# Altium PCB PCB1.PcbDoc
Units mil, origin at the board's own origin, x right, y up, seen from the top; angles counter-clockwise.
Board outline 6000 x 4000 mil, 2 copper layers (Top Layer, Bottom Layer); 59 components, 21 nets, 89 pads, 0 vias.
Unrouted connection lines stored in the file: 56.
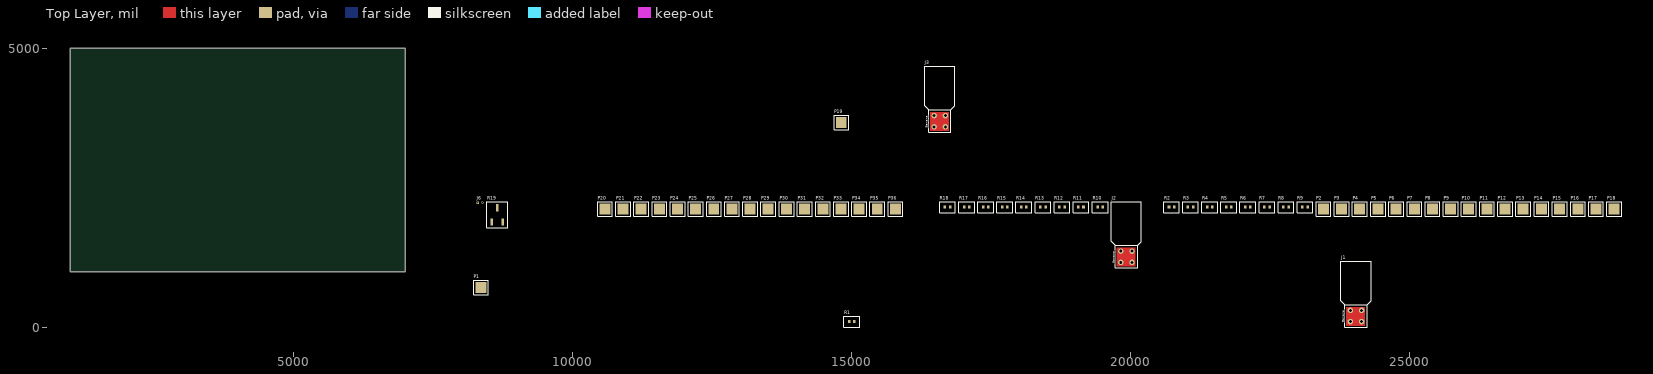
[diagram p0: Top Layer view]
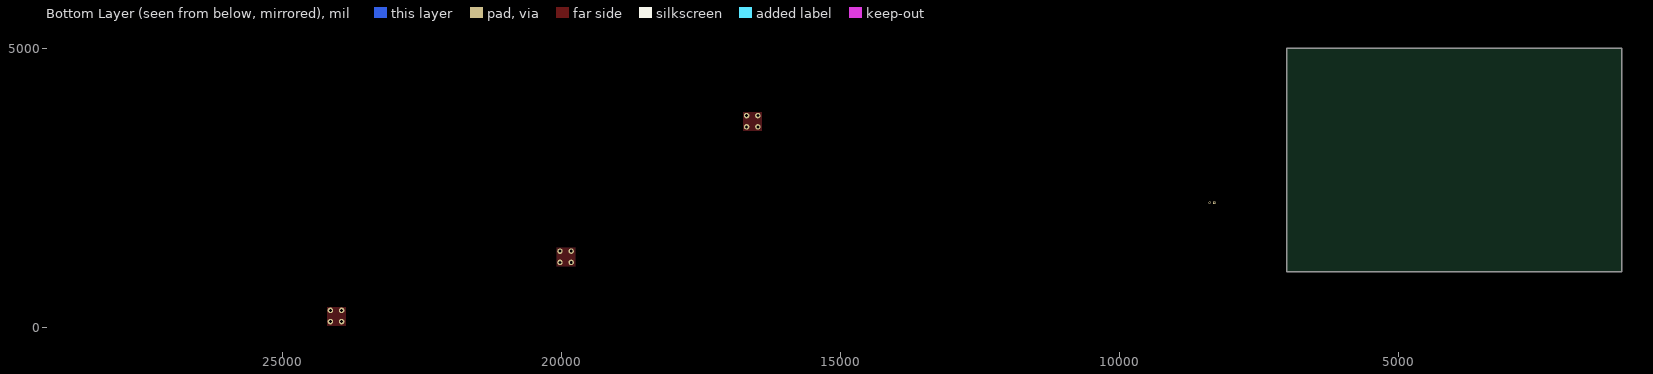
[diagram p1: Bottom Layer view, seen from below]

## Layer stack, top to bottom
Top Solder: solder mask 0.4, Solder Resist, Dk 3.5
Top Layer: signal copper 1.4
Dielectric 1: dielectric 12.6, FR-4, Dk 4.8
Bottom Layer: signal copper 1.4
Bottom Solder: solder mask 0.4, Solder Resist, Dk 3.5

## Board outline
1000,1000 7000,1000 7000,5000 1000,5000

## Design rules (kind name [scope] priority, off if disabled: settings)
Clearance [All] p1: gap=10 ignorepadtopadclearanceinfootprint=FALSE except(0: Arc-Hole Track-Hole SMDPad-Hole THPad-Hole Via-Hole Fill-Hole Poly-Hole Region-Hole Text-Hole)
PolygonConnect [All] p1: connectstyle=Relief reliefconductorwidth=10 reliefentries=4 polygonreliefangle="90 Angle" airgapwidth=10
RoutingVias [All] p1: holewidth=28 width=50 viastyle="Through Hole" minholewidth=28 minwidth=50 maxholewidth=28 maxwidth=50
SolderMaskExpansion [All] p1: expansion=4 istentingtop=FALSE
Width [All] p1: maxlimit=10 minlimit=10 preferedwidth=10
30 further rules are at their usual default settings.

## Components (designator, comment, footprint, x,y, rotation, side; value= is the part's Value field where it differs from the comment)
J1 "CT3151SP-0" CT3151SP-0 23939.21,103.43 r90 top
J2 "CT3151SP-0" CT3151SP-0 19825,1165 r90 top
J3 "CT3151SP-0" CT3151SP-0 16480,3594.21 r90 top
J6 "MOLEX TTL" "MOLEX TTL" 8300,2235 r0 top
P1 "SLAVEBOARD CONTACT" "SLAVEBOARD CONTACT" 8355,715 r0 top
P2 "SLAVEBOARD CONTACT" "SLAVEBOARD CONTACT" 23455,2125 r0 top
P3 "SLAVEBOARD CONTACT" "SLAVEBOARD CONTACT" 23780,2125 r0 top
P4 "SLAVEBOARD CONTACT" "SLAVEBOARD CONTACT" 24105,2125 r0 top
P5 "SLAVEBOARD CONTACT" "SLAVEBOARD CONTACT" 24435,2125 r0 top
P6 "SLAVEBOARD CONTACT" "SLAVEBOARD CONTACT" 24760,2125 r0 top
P7 "SLAVEBOARD CONTACT" "SLAVEBOARD CONTACT" 25085,2125 r0 top
P8 "SLAVEBOARD CONTACT" "SLAVEBOARD CONTACT" 25410,2125 r0 top
P9 "SLAVEBOARD CONTACT" "SLAVEBOARD CONTACT" 25735,2125 r0 top
P10 "SLAVEBOARD CONTACT" "SLAVEBOARD CONTACT" 26060,2125 r0 top
P11 "SLAVEBOARD CONTACT" "SLAVEBOARD CONTACT" 26385,2125 r0 top
P12 "SLAVEBOARD CONTACT" "SLAVEBOARD CONTACT" 26710,2125 r0 top
P13 "SLAVEBOARD CONTACT" "SLAVEBOARD CONTACT" 27035,2125 r0 top
P14 "SLAVEBOARD CONTACT" "SLAVEBOARD CONTACT" 27360,2125 r0 top
P15 "SLAVEBOARD CONTACT" "SLAVEBOARD CONTACT" 27690,2125 r0 top
P16 "SLAVEBOARD CONTACT" "SLAVEBOARD CONTACT" 28015,2125 r0 top
P17 "SLAVEBOARD CONTACT" "SLAVEBOARD CONTACT" 28340,2125 r0 top
P18 "SLAVEBOARD CONTACT" "SLAVEBOARD CONTACT" 28665,2125 r0 top
P19 "SLAVEBOARD CONTACT" "SLAVEBOARD CONTACT" 14815,3670 r0 top
P20 "SLAVEBOARD CONTACT" "SLAVEBOARD CONTACT" 10580,2125 r0 top
P21 "SLAVEBOARD CONTACT" "SLAVEBOARD CONTACT" 10905,2125 r0 top
P22 "SLAVEBOARD CONTACT" "SLAVEBOARD CONTACT" 11230,2125 r0 top
P23 "SLAVEBOARD CONTACT" "SLAVEBOARD CONTACT" 11555,2125 r0 top
P24 "SLAVEBOARD CONTACT" "SLAVEBOARD CONTACT" 11880,2125 r0 top
P25 "SLAVEBOARD CONTACT" "SLAVEBOARD CONTACT" 12205,2125 r0 top
P26 "SLAVEBOARD CONTACT" "SLAVEBOARD CONTACT" 12530,2125 r0 top
P27 "SLAVEBOARD CONTACT" "SLAVEBOARD CONTACT" 12855,2125 r0 top
P28 "SLAVEBOARD CONTACT" "SLAVEBOARD CONTACT" 13180,2125 r0 top
P29 "SLAVEBOARD CONTACT" "SLAVEBOARD CONTACT" 13505,2125 r0 top
P30 "SLAVEBOARD CONTACT" "SLAVEBOARD CONTACT" 13835,2125 r0 top
P31 "SLAVEBOARD CONTACT" "SLAVEBOARD CONTACT" 14160,2125 r0 top
P32 "SLAVEBOARD CONTACT" "SLAVEBOARD CONTACT" 14485,2125 r0 top
P33 "SLAVEBOARD CONTACT" "SLAVEBOARD CONTACT" 14810,2125 r0 top
P34 "SLAVEBOARD CONTACT" "SLAVEBOARD CONTACT" 15135,2125 r0 top
P35 "SLAVEBOARD CONTACT" "SLAVEBOARD CONTACT" 15460,2125 r0 top
P36 "SLAVEBOARD CONTACT" "SLAVEBOARD CONTACT" 15785,2125 r0 top
R1 "1622796-6" "CHP0805-FX-1002ELF - duplicate" 15001.26,102.36 r0 top
R2 "1622796-6" "CHP0805-FX-1002ELF - duplicate" 20735,2155 r0 top
R3 "1622796-6" "CHP0805-FX-1002ELF - duplicate" 21075,2155 r0 top
R4 "1622796-6" "CHP0805-FX-1002ELF - duplicate" 21420,2155 r0 top
R5 "1622796-6" "CHP0805-FX-1002ELF - duplicate" 21760,2155 r0 top
R6 "1622796-6" "CHP0805-FX-1002ELF - duplicate" 22100,2155 r0 top
R7 "1622796-6" "CHP0805-FX-1002ELF - duplicate" 22445,2155 r0 top
R8 "1622796-6" "CHP0805-FX-1002ELF - duplicate" 22785,2155 r0 top
R9 "1622796-6" "CHP0805-FX-1002ELF - duplicate" 23125,2155 r0 top
R10 "1622796-6" "CHP0805-FX-1002ELF - duplicate" 19455,2155 r0 top
R11 "1622796-6" "CHP0805-FX-1002ELF - duplicate" 19110,2155 r0 top
R12 "1622796-6" "CHP0805-FX-1002ELF - duplicate" 18770,2155 r0 top
R13 "1622796-6" "CHP0805-FX-1002ELF - duplicate" 18430,2155 r0 top
R14 "1622796-6" "CHP0805-FX-1002ELF - duplicate" 18085,2155 r0 top
R15 "1622796-6" "CHP0805-FX-1002ELF - duplicate" 17745,2155 r0 top
R16 "1622796-6" "CHP0805-FX-1002ELF - duplicate" 17405,2155 r0 top
R17 "1622796-6" "CHP0805-FX-1002ELF - duplicate" 17065,2155 r0 top
R18 "1622796-6" "CHP0805-FX-1002ELF - duplicate" 16720,2155 r0 top
R19 "potentiometer" 3361P-1-103GLF_SOP3 8545,1995 r0 top

## Footprints (in the part's own frame and the unit in brackets; to place one, negate y for a bottom-side part, rotate by r counter-clockwise, add the part's x,y. Pads: shape width x height; smd on the part's side, far side on the other; paste and mask are expansions set on the pad)
3361P-1-103GLF_SOP3 [mm]
  rect 1.19x3.3 smd: 21(0.127,-2.667) 21(2.667,3.81) 21(5.207,-2.667)
  silkscreen extent -2.03,-5.33 7.37,6.48
"CHP0805-FX-1002ELF - duplicate" [mm]
  rect 1.15x1.3 smd: 1(-1.175,0) 2(1.175,0)
  silkscreen extent -3.6,-2.5 3.6,2.5
CT3151SP-0 [mm]
  round 2.5 hole 1.3: 1(0,0) 1(0,-5.1) 1(5.1,-5.1) 1(5.1,0)
  Top Layer region: -1.905,-6.731 6.731,-6.731 6.731,1.905 -1.905,1.905
  silkscreen extent -2.5,-9.4 27.56,4.32
"MOLEX TTL" [mm]
  rect 1x1 hole 0.643 paste-2539.97: 1(0,0)
  round 1 hole 0.643 paste-2539.97: 2(2.159,0)
"SLAVEBOARD CONTACT" [mm]
  rect 5x5 smd: 1(0,0)
  silkscreen extent -3.3,-3.3 3.43,3.3

## Part data
J1 J2 J3: "Conn 4mm Safety Banana Jack F 1 POS Solder RA Thru-Hole 1 Port Bag", Color=Black, Manufacturer="Cal Test Electronics", Max Operating Temperature=80°C, Min Operating Temperature=-20°C, Supplier Part Number 1=BKCT3151SP-0-ND, Body Material=Nylon,Polyamide, Category=Connectors, ComponentLink1Description=http://www.caltestelectronics.com/images/attachments/P315100rH_drawing.pdf?src-supplier=Digi-Key, ComponentLink1URL=http://www.caltestelectronics.com/images/attachments/P315100rH_drawing.pdf?src-supplier=Digi-Key, Contact Material=Brass, Contact Plating=Nickel, Gender=Female, Insulation="Mating End Insulated", Manufacturer Part Number=CT3151SP-0, Mount="Through Hole,Panel", Packaging=Bulk, Pricing 1="1=2.05000 (USD)", RoHS=Yes, Stock 1=6317, Supplier 1=Digi-Key, Termination=Solder
R1 R2 R3 R4 R5 R6 R7 R8 R9 R10 R11 R12 R13 R14 R15 R16 R17 R18: "Res Thin Film 10K Ohm 0.1% 1/4W 15ppm/C Conformal AXL Thru-Hole Ammo Pack", Case/Package=Conformal, Manufacturer="TE Connectivity", Max Operating Temperature=155°C, Max Power Dissipation=250mW, Min Operating Temperature=-65°C, Package Quantity=1000, Resistance=10kR, Resistor Type="Metal Film,Thin Film", Supplier Part Number 1=A105970CT-ND, Temperature Coefficient=15ppm/°C, Tolerance=0.1%, Category="Through-Hole Resistors", ComponentLink1Description=https://datasheet.ciiva.com/8332/eng-ds-1773265-a-8332394.pdf?src-supplier=Avnet, ComponentLink1URL=https://datasheet.ciiva.com/8332/eng-ds-1773265-a-8332394.pdf?src-supplier=Avnet, ComponentLink2Description=https://datasheet.ciiva.com/6532/eng-ds-1773265-a-6532773.pdf?src-supplier=Digi-Key, ComponentLink2URL=https://datasheet.ciiva.com/6532/eng-ds-1773265-a-6532773.pdf?src-supplier=Digi-Key, ComponentLink3Description=https://datasheet.ciiva.com/48735/eng-ds-1773265-a-48735567.pdf?src-supplier=Onlinecomponents.com, ComponentLink3URL=https://datasheet.ciiva.com/48735/eng-ds-1773265-a-48735567.pdf?src-supplier=Onlinecomponents.com, Construction=Cylindrical, Diameter=2.3mm, Length=6.3mm, Manufacturer Part Number=1622796-6, Military Standard=Not, Mount="Through Hole", Number of Terminations=2, Packaging="Tape and Reel", Pricing 1="1=0.60000, 10=0.50300, 25=0.43120, 50=0.38800, 100=0.33780, 250=0.30184, 500=0.24436 (USD)", RoHS=Yes, RoHS Compliant=Yes, Series="YR, Neohm", Stock 1=35957, Supplier 1=Digi-Key, Termination=Axial

## Nets (pads, with @x,y where several pads share a name; then routed paths per layer and width w, separated by ;. In a path a pad name is that pad's centre, name@x,y a point inside that pad or via, vN(x,y) a via of type N, cw(c..) or ccw(c..) an arc to the next point about the centre after c; other vN are vias at no path point)
60V: J1.1 P1.1 R1.2
GND: J3.1 P19.1 R18.2
NetJ2_1: J2.1 P18.1 P36.1 R9.1 R10.1
NetJ6_1: J6.1
NetJ6_2: J6.2
NetP2_1: P2.1 P3.1 R1.1 R2.2
NetP4_1: P4.1 P5.1 R2.1 R3.2
NetP6_1: P6.1 P7.1 R3.1 R4.2
NetP8_1: P8.1 P9.1 R4.1 R5.2
NetP10_1: P10.1 P11.1 R5.1 R6.2
NetP12_1: P12.1 P13.1 R6.1 R7.2
NetP14_1: P14.1 P15.1 R7.1 R8.2
NetP16_1: P16.1 P17.1 R8.1 R9.2
NetP20_1: P20.1 P21.1 R17.2 R18.1
NetP22_1: P22.1 P23.1 R16.2 R17.1
NetP24_1: P24.1 P25.1 R15.2 R16.1
NetP26_1: P26.1 P27.1 R14.2 R15.1
NetP28_1: P28.1 P29.1 R13.2 R14.1
NetP30_1: P30.1 P31.1 R12.2 R13.1
NetP32_1: P32.1 P33.1 R11.2 R12.1
NetP34_1: P34.1 P35.1 R10.2 R11.1
pads on no net: R19.21

## Text inside footprints (layer, text, board x,y; h text height)
J1: Top Overlay "Banana" at 23826.34,91.3 h39.37 r90
J2: Top Overlay "Banana" at 19712.13,1152.87 h39.37 r90
J3: Top Overlay "Banana" at 16367.13,3582.09 h39.37 r90